# Altium PCB pcb.PcbDoc
Units mm, origin at the board's own origin, x right, y up, seen from the top; angles counter-clockwise.
Board outline 99.95 x 50 mm, 2 copper layers (Top Layer, Bottom Layer); 14 components, 19 nets, 71 pads, 0 vias.
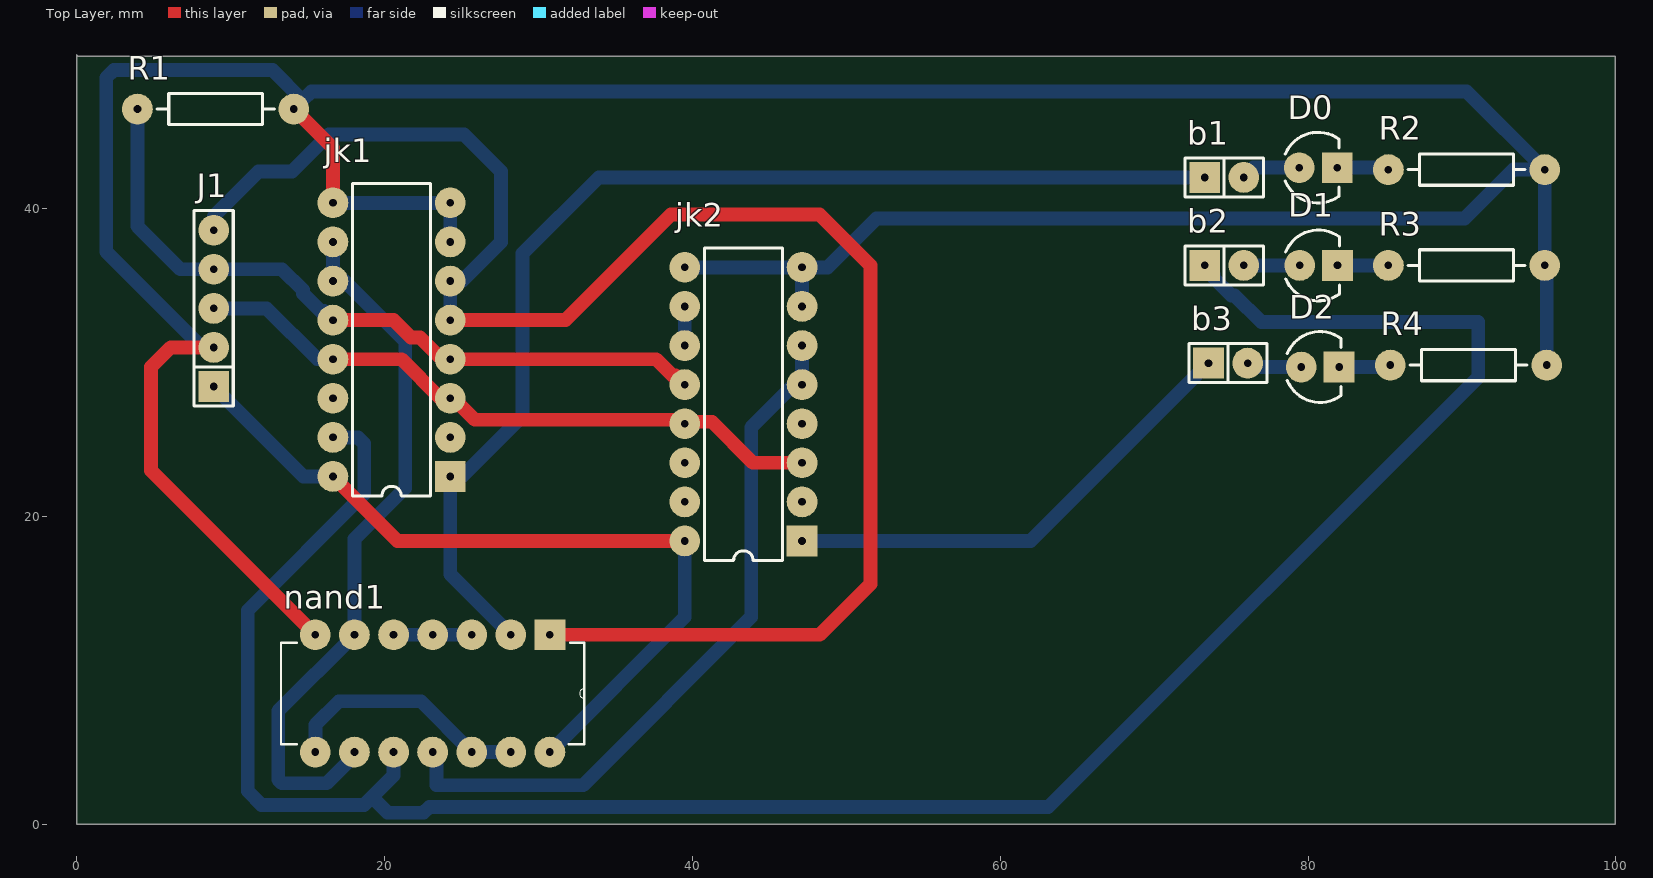
[diagram p0: Top Layer view]
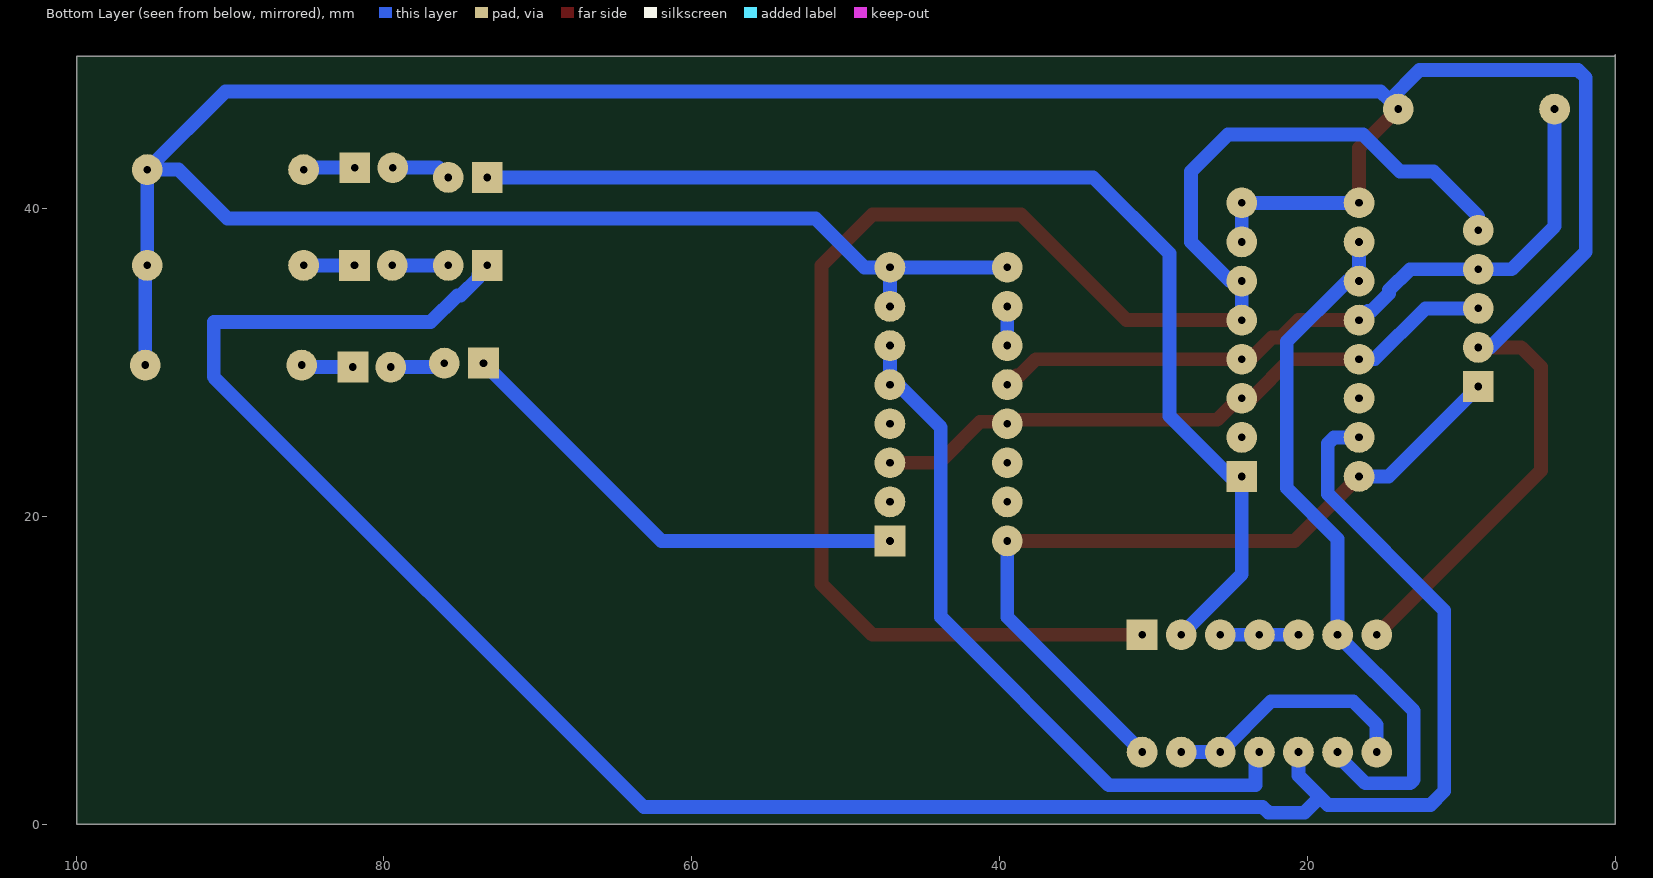
[diagram p1: Bottom Layer view, seen from below]

## Layer stack, top to bottom
Top Solder: solder mask 0.0102, Solder Resist, Dk 3.5
Top Layer: signal copper 0.0356
Dielectric 1: dielectric 0.32, FR-4, Dk 4.8
Bottom Layer: signal copper 0.0356
Bottom Solder: solder mask 0.0102, Solder Resist, Dk 3.5

## Board outline
0,0 99.949,0 99.949,49.911 0.089,49.911 0,50

## Design rules (kind name [scope] priority, off if disabled: settings)
Clearance [All] p1: gap=0.3 ignorepadtopadclearanceinfootprint=FALSE
PolygonConnect [All] p1: connectstyle=Relief reliefconductorwidth=0.254 reliefentries=4 polygonreliefangle="90 Angle" airgapwidth=0.254
RoutingVias [All] p1: holewidth=0.711 width=1.27 viastyle="Through Hole" minholewidth=0.711 minwidth=1.27 maxholewidth=0.711 maxwidth=1.27
SolderMaskExpansion [All] p1: expansion=0.102
Width [All] p1: maxlimit=0.9 minlimit=0.9 preferedwidth=0.9
30 further rules are at their usual default settings.

## Components (designator, comment, footprint, x,y, rotation, side; value= is the part's Value field where it differs from the comment)
b1 "CON2" SIP2 74.549,42.037 r0 top
b2 "CON2" SIP2 74.549,36.322 r0 top
b3 "CON2" SIP2 74.803,29.972 r0 top
D0 "LED" LED3 80.645,42.672 r0 top
D1 "LED" LED3 80.67,36.322 r0 top
D2 "LED" LED3 80.772,29.718 r0 top
J1 "CON5" SIP5 8.89,28.448 r90 top
jk1 "IC_DIP16" DIP16 24.257,22.606 r180 top
jk2 "IC_DIP16" DIP16 47.117,18.415 r180 top
nand1 "SN74HC00N" DIP254P762X508-14 15.494,4.699 r270 top
R1 "RES" RES400 14.097,46.482 r180 top
R2 "RES" RES400 85.217,42.545 r0 top
R3 "RES" RES400 85.217,36.322 r0 top
R4 "RES" RES400 85.344,29.845 r0 top

## Footprints (in the part's own frame and the unit in brackets; to place one, negate y for a bottom-side part, rotate by r counter-clockwise, add the part's x,y. Pads: shape width x height; smd on the part's side, far side on the other; paste and mask are expansions set on the pad)
DIP16 [mm]
  rect 2x2 hole 0.5: 1(0,0)
  round 2 hole 0.5: 2(0,-2.54) 3(0,-5.08) 4(0,-7.62) 5(0,-10.16) 6(0,-12.7) 7(0,-15.24) 8(0,-17.78) 9(7.62,-17.78) 10(7.62,-15.24) 11(7.62,-12.7) 12(7.62,-10.16) 13(7.62,-7.62) 14(7.62,-5.08) 15(7.62,-2.54) 16(7.62,0)
  silkscreen extent 1.27,-19.05 6.35,1.27, body extent -0.08,-18.89 7.79,1.11, height 1.98
DIP254P762X508-14 [mm]
  rect 2x2 hole 0.5: 1(-7.62,15.24)
  round 2 hole 0.5: 2(-7.62,12.7) 3(-7.62,10.16) 4(-7.62,7.62) 5(-7.62,5.08) 6(-7.62,2.54) 7(-7.62,0) 8(0,0) 9(0,2.54) 10(0,5.08) 11(0,7.62) 12(0,10.16) 13(0,12.7) 14(0,15.24)
  silkscreen extent -7.11,-2.24 -0.51,17.48
LED3 [mm]
  round 2 hole 0.5: 1(-1.219,0)
  rect 2x2 hole 0.5: 2(1.245,0)
  silkscreen extent -2.13,-2.3 1.36,2.3, body extent -1.65,-1.63 1.65,1.66, height 0.49
RES400 [mm]
  round 2 hole 0.5: 1(0,0) 2(10.16,0)
  silkscreen extent 1.27,-1.02 8.89,1.02, body extent -0.3,-1.14 10.46,1.17, height 2.43
SIP2 [mm]
  rect 2x2 hole 0.5: 1(-1.27,0)
  round 2 hole 0.5: 2(1.27,0)
  silkscreen extent -2.54,-1.27 2.54,1.27
SIP5 [mm]
  rect 2x2 hole 0.5: 1(0,0)
  round 2 hole 0.5: 2(2.54,0) 3(5.08,0) 4(7.62,0) 5(10.16,0)
  silkscreen extent -1.27,-1.27 11.43,1.27, body extent -1.27,-1.27 11.43,1.27, height 8.38

## Part data
nand1: "NAND Gate 4-Element 2-IN CMOS 14-Pin PDIP NAND Gate 4-Element 2-IN CMOS 14-Pin PDIP NAND Gate 4-Element 2-IN CMOS 14-...", Package="DIP-14 Texas Instruments", Availability=Unavailable, MF="Texas Instruments", MP=SN74HC00N, Price=None, SnapEDA_Link=https://www.snapeda.com/parts/SN74HC00N/Texas%20Instruments/view-part/?ref=snap

## Nets (pads, with @x,y where several pads share a name; then routed paths per layer and width w, separated by ;. In a path a pad name is that pad's centre, name@x,y a point inside that pad or via, vN(x,y) a via of type N, cw(c..) or ccw(c..) an arc to the next point about the centre after c; other vN are vias at no path point)
clk: J1.3 jk1.3 jk1.13 jk2.3 jk2.13 | length 42.5
  Top Layer w0.9: jk1.13 21.082,30.226 23.622,27.686 jk1.3 24.475,27.686 25.872,26.289 39.243,26.289 jk2.13 39.624,26.162 41.275,26.162 43.942,23.495 jk2.3
  Bottom Layer w0.9: J1.3 12.319,33.528 15.621,30.226 jk1.13
d0: b1.1 jk1.1 nand1.2 | length 75.2
  Bottom Layer w0.9: nand1.2 24.257,16.256 jk1.1 25.019,22.606 28.956,26.543 28.956,37.084 33.909,42.037 b1.1
d1: b2.1 jk1.15 nand1.10 | length 147.1
  Bottom Layer w0.9: jk1.15 18.274,25.146 18.669,24.751 18.669,21.463 11.101,13.895 11.101,2.159 11.99,1.27 18.669,1.27 19.174,1.775 ; nand1.10 20.574,3.175 19.174,1.775 ; b2.1 73.869,35.732 73.869,35.514 75.011,34.372 75.229,34.372 76.962,32.639 91.059,32.639 91.059,29.083 63.116,1.14 22.915,1.14 22.534,0.759 20.19,0.759 19.174,1.775
d2: b3.1 jk2.1 | length 31.2
  Bottom Layer w0.9: jk2.1 61.976,18.415 b3.1
en: J1.5 jk1.5 jk1.6 nand1.1 | length 108.6
  Top Layer w0.9: jk1.5 31.75,32.766 38.608,39.624 48.26,39.624 51.562,36.322 51.562,15.621 48.26,12.319 nand1.1
  Bottom Layer w0.9: J1.5 8.89,39.497 11.811,42.418 13.97,42.418 16.383,44.831 25.146,44.831 27.559,42.418 27.559,37.846 25.019,35.306 jk1.6 jk1.5
GND: J1.2 jk1.7 jk1.8 jk1.9 jk2.7 jk2.8 jk2.9 nand1.7 R1.1 R2.2 R3.2 R4.2 | length 235.2
  Top Layer w0.9: J1.2 6.096,30.988 4.826,29.718 4.826,22.987 nand1.7 ; R1.1 16.637,43.942 jk1.9
  Bottom Layer w0.9: J1.2 8.128,30.988 1.905,37.211 1.905,48.514 2.413,49.022 12.7,49.022 14.668,47.053 15.24,47.625 90.297,47.625 R2.2 ; jk1.9 jk1.8 jk1.7 ; jk2.9 jk2.8 ; jk2.7 jk2.8 ; R4.2 95.504,36.195 R3.2 R2.2 ; jk2.8 48.768,36.195 51.943,39.37 90.17,39.37 93.345,42.545 R2.2
Netb1_2: b1.2 D0.1 | length 3.9
  Bottom Layer w0.9: b1.2 76.454,42.672 D0.1
Netb2_2: b2.2 D1.1 | length 3.6
  Bottom Layer w0.9: b2.2 D1.1
Netb3_2: b3.2 D2.1 | length 3.6
  Bottom Layer w0.9: b3.2 76.327,29.718 D2.1
NetD0_2: D0.2 R2.1 | length 3.4
  Bottom Layer w0.9: D0.2 85.09,42.672 R2.1
NetD1_2: D1.2 R3.1 | length 3.3
  Bottom Layer w0.9: D1.2 R3.1
NetD2_2: D2.2 R4.1 | length 3.4
  Bottom Layer w0.9: D2.2 85.217,29.718 R4.1
Netjk1_10: jk1.10 jk1.11 nand1.6 nand1.9 | length 47.5
  Bottom Layer w0.9: jk1.10 jk1.11 17.399,35.306 21.336,31.369 21.336,21.844 18.034,18.542 nand1.6 13.081,7.366 13.081,2.911 13.322,2.67 16.223,2.67 18.034,4.481 nand1.9 ; nand1.9@17.663,4.826 nand1.9@18.415,4.826
Netjk2_5: jk2.5 jk2.6 nand1.11 | length 46.6
  Bottom Layer w0.9: nand1.11 23.368,4.445 23.368,2.54 32.893,2.54 43.815,13.462 43.815,25.781 46.609,28.575 jk2.5 jk2.6
Netjk2_10: jk2.10 jk2.11 | length 2.5
  Bottom Layer w0.9: jk2.11 jk2.10
Netnand1_3: nand1.3 nand1.4 nand1.5 | length 5.1
  Bottom Layer w0.9: nand1.5 nand1.4 nand1.3
Netnand1_8: nand1.8 nand1.12 nand1.13 | length 16.5
  Bottom Layer w0.9: nand1.8 15.494,6.477 17.018,8.001 22.352,8.001 nand1.12 nand1.13
rst: J1.4 jk1.4 jk1.12 jk2.12 R1.2 | length 47.6
  Top Layer w0.9: jk1.12 20.574,32.766 21.714,31.626 22.297,31.626 23.697,30.226 jk1.4 37.628,30.226 38.689,29.165 38.907,29.165 jk2.12
  Bottom Layer w0.9: R1.2 3.937,38.862 6.731,36.068 J1.4 13.335,36.068 14.687,34.716 14.687,34.498 15.829,33.356 16.047,33.356 jk1.12
VCC: J1.1 jk1.16 jk2.16 nand1.14 | length 52.1
  Top Layer w0.9: jk1.16 20.828,18.415 jk2.16
  Bottom Layer w0.9: J1.1 14.732,22.606 jk1.16 ; nand1.14 39.497,13.462 jk2.16
pads on no net: jk1.2 jk1.14 jk2.2 jk2.4 jk2.14 jk2.15